# Altium PCB PCB1.PcbDoc (part 2 of 2)
Units mil, origin at the board's own origin, x right, y up, seen from the top; angles counter-clockwise.
Board outline 7000 x 5000 mil, 3 copper layers (Top Layer, GND, Bottom Layer), stack 19.578 mil thick; 137 components, 117 nets, 425 pads, 17 vias.
Unrouted connection lines stored in the file: 185.
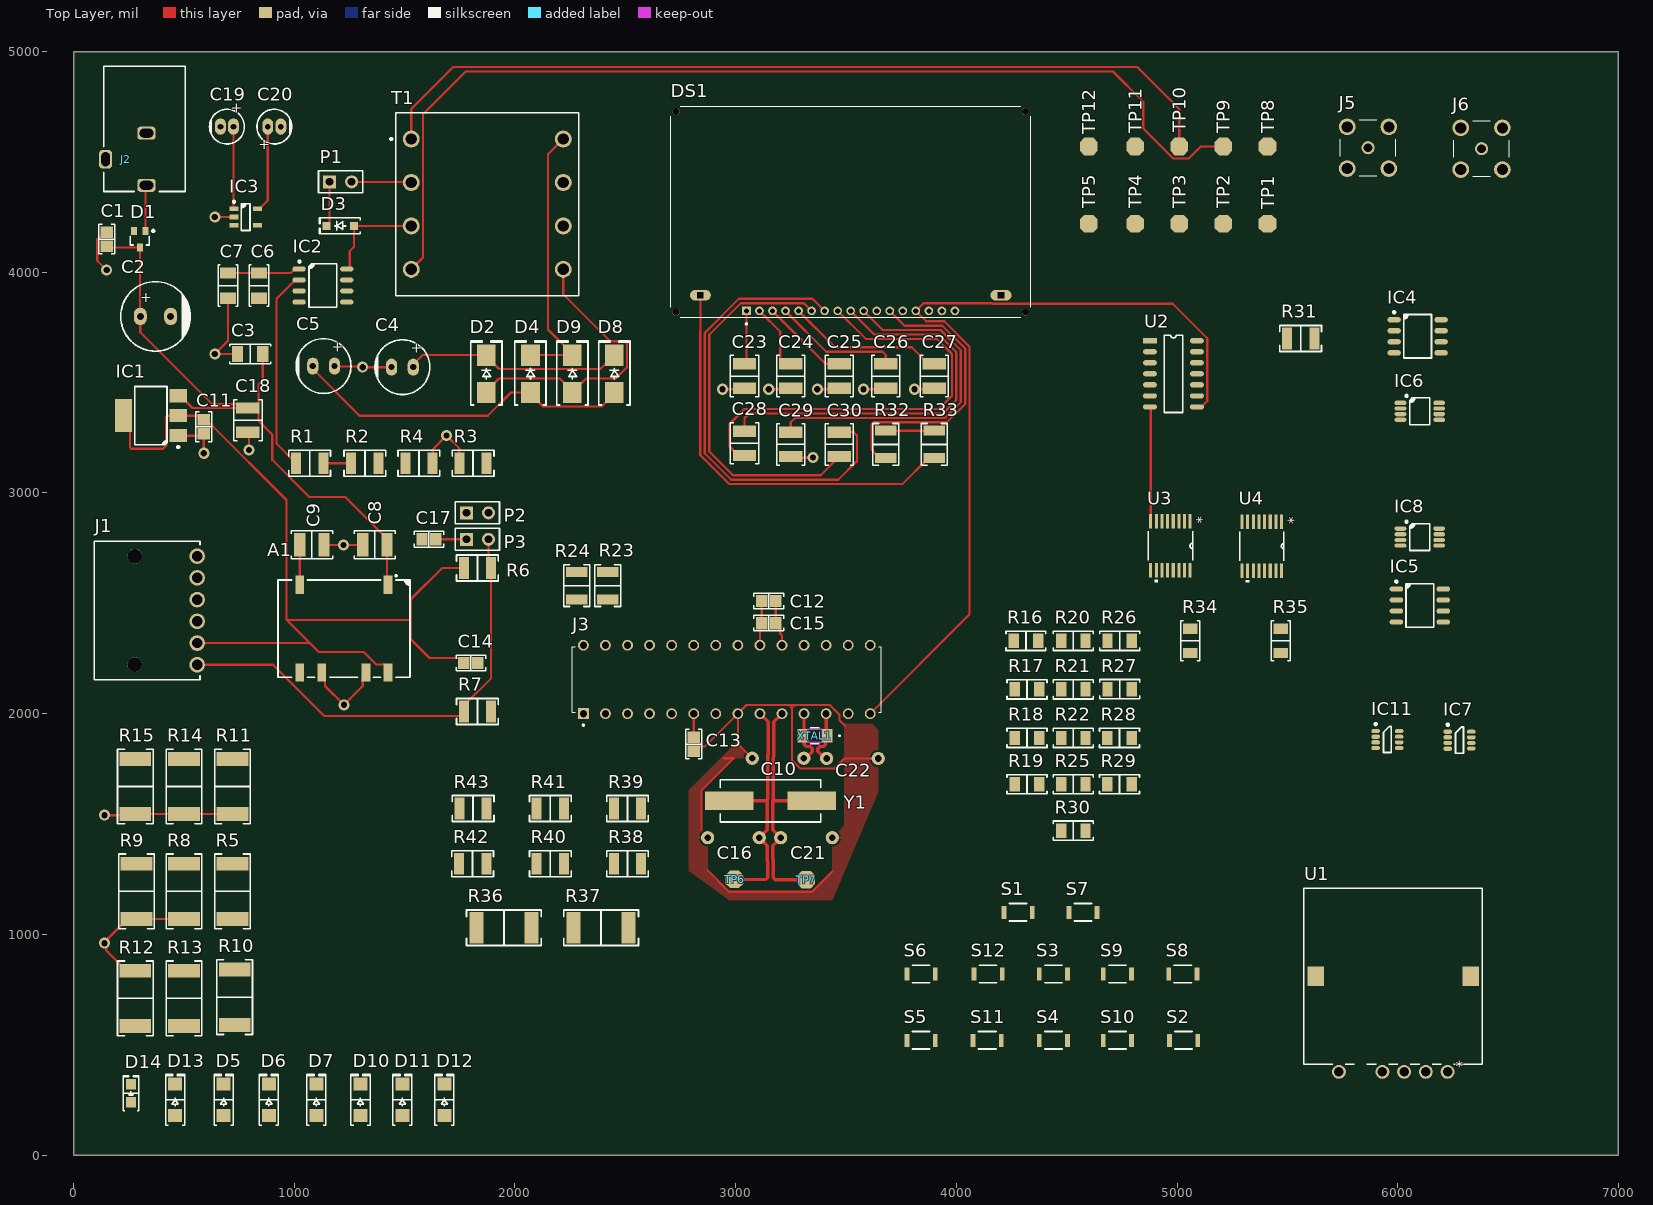
[diagram p0: Top Layer view]

## Part data (continued)
R4: library part RC1210JR-072KL, "RES 2K OHM 5% 1/2W 1210", Device Package="1210 (3225 Metric)", manufacturer=Yageo, Operating Temperature="-55°C ~ 155°C", Power (Watts)="0.5W, 1/2W", Supplier Device Package=1210, Supplier Part Number 1=13-RC1210JR-072KLCT-ND, Temperature Coefficient=±100ppm/°C, Tolerance=±5%, componentlink1description=Datasheet, componentlink1url=https://www.yageo.com/upload/media/product/productsearch/datasheet/rchip/PYu-RC_Group_51_RoHS_L_11.pdf, componentlink2description="DigiKey Link", componentlink2url=https://www.digikey.com/en/products/detail/yageo/RC1210JR-072KL/5919910, Composition="Thick Film", Features="Moisture Resistant", Height - Seated (Max)="0.024\" (0.60mm)", lastupdated="8/02/2024 9:49:20 PM", Lifecycle Status=Active, Minimum Order=1, Number of Terminations=2, Package / Case="1210 (3225 Metric)", packaging=TapeAndReel, Part Number=RC1210JR-072KL, Part Status=Active, price=0.01, Resistance="2 kOhms", series=RC_L, Size / Dimension="0.122\" L x 0.102\" W (3.10mm x 2.60mm)", Supplier 1=DigiKey
R5 R10 R12: library part RK73H3ATTE1000F, "RES 100 OHM 1% 1W 2512", Device Package="2512 (6432 Metric)", manufacturer="KOA Speer Electronics, Inc.", Operating Temperature="-55°C ~ 155°C", Power (Watts)=1W, Ratings=AEC-Q200, Supplier Device Package=2512, Supplier Part Number 1=2019-RK73H3ATTE1000FCT-ND, Temperature Coefficient=±100ppm/°C, Tolerance=±1%, componentlink1description=Datasheet, componentlink1url=http://www.koaspeer.com/catimages/Products/RK73H/RK73H.pdf, componentlink2description="DigiKey Link", componentlink2url=http://digikey.com/product-detail/en/koa-speer-electronics-inc/RK73H3ATTE1000F/2019-RK73H3ATTE1000FCT-ND/10425070, Composition="Thick Film", Features="Automotive AEC-Q200, Moisture Resistant", Height - Seated (Max)="0.028\" (0.70mm)", lastupdated="2/09/2020 1:26:50 AM", Lifecycle Status=Active, Minimum Order=1, Number of Terminations=2, Package / Case="2512 (6432 Metric)", packaging=TapeAndReel, Part Number=RK73H3ATTE1000F, Part Status=Active, price=0.05, Resistance="100 Ohms", series=RK73H, Size / Dimension="0.248\" L x 0.122\" W (6.30mm x 3.10mm)", Supplier 1=DigiKey
R6 R38 R39 R40 R41 R42 R43: library part CRMA1210AF10K0FKEF, "CRMA1210 10K 1% EF E3", Device Package="1210 (3225 Metric)", manufacturer="Vishay Dale", Operating Temperature="-55°C ~ 155°C", Power (Watts)=0.35W, Ratings=AEC-Q200, Supplier Device Package=1210, Supplier Part Number 1=541-CRMA1210AF10K0FKEFCT-ND, Temperature Coefficient=±100ppm/°C, Tolerance=±1%, componentlink1description=Datasheet, componentlink1url=https://www.vishay.com/docs/68043/crma.pdf, componentlink2description="DigiKey Link", componentlink2url=https://www.digikey.com/en/products/detail/vishay-dale/CRMA1210AF10K0FKEF/13998641, Composition="Thick Film", Features="Automotive AEC-Q200, Moisture Resistant", Height - Seated (Max)="0.029\" (0.74mm)", lastupdated="3/06/2024 8:18:49 PM", Lifecycle Status=Active, Minimum Order=1, Number of Terminations=2, Package / Case="1210 (3225 Metric)", packaging=TapeAndReel, Part Number=CRMA1210AF10K0FKEF, Part Status=Active, price=0.17, Resistance="10 kOhms", series=CRMA, Size / Dimension="0.125\" L x 0.100\" W (3.18mm x 2.54mm)", Supplier 1=DigiKey
R7: library part CRCW1210470KJNEA, "RES SMD 470K OHM 5% 1/2W 1210", Device Package="1210 (3225 Metric)", manufacturer="Vishay Dale", Operating Temperature="-55°C ~ 155°C", Power (Watts)="0.5W, 1/2W", Ratings=AEC-Q200, Supplier Device Package=1210, Supplier Part Number 1=541-470KVCT-ND, Temperature Coefficient=±200ppm/°C, Tolerance=±5%, componentlink1description=Datasheet, componentlink1url=http://www.vishay.com/docs/20035/dcrcwe3.pdf, componentlink2description="DigiKey Link", componentlink2url=https://www.digikey.com/en/products/detail/vishay-dale/CRCW1210470KJNEA/1177238, Composition="Thick Film", Features="Automotive AEC-Q200", Height - Seated (Max)="0.024\" (0.60mm)", lastupdated="3/06/2024 8:19:03 PM", Lifecycle Status=Active, Minimum Order=1, Number of Terminations=2, Package / Case="1210 (3225 Metric)", packaging=TapeAndReel, Part Number=CRCW1210470KJNEA, Part Status=Active, price=0.02, Resistance="470 kOhms", series="D/CRCW e3", Size / Dimension="0.126\" L x 0.098\" W (3.20mm x 2.50mm)", Supplier 1=DigiKey
R8 R36 R37: library part RK73H3ATTE28R0F, "RES 28 OHM 1% 1W 2512", Device Package="2512 (6432 Metric)", manufacturer="KOA Speer Electronics, Inc.", Operating Temperature="-55°C ~ 155°C", Power (Watts)=1W, Ratings=AEC-Q200, Supplier Device Package=2512, Supplier Part Number 1=2019-RK73H3ATTE28R0FCT-ND, Temperature Coefficient=±100ppm/°C, Tolerance=±1%, componentlink1description=Datasheet, componentlink1url=http://www.koaspeer.com/catimages/Products/RK73H/RK73H.pdf, componentlink2description="DigiKey Link", componentlink2url=http://digikey.com/product-detail/en/koa-speer-electronics-inc/RK73H3ATTE28R0F/2019-RK73H3ATTE28R0FCT-ND/10425047, Composition="Thick Film", Features="Automotive AEC-Q200, Moisture Resistant", Height - Seated (Max)="0.028\" (0.70mm)", lastupdated="11/04/2023 8:12:36 PM", Lifecycle Status=Active, Minimum Order=1, Number of Terminations=2, Package / Case="2512 (6432 Metric)", packaging=TapeAndReel, Part Number=RK73H3ATTE28R0F, Part Status=Active, price=0.05, Resistance="28 Ohms", series=RK73H, Size / Dimension="0.248\" L x 0.122\" W (6.30mm x 3.10mm)", Supplier 1=DigiKey
R9 R11 R13: library part CRCW2512215KFKEG, "RES SMD 215K OHM 1% 1W 2512", Device Package="2512 (6432 Metric)", manufacturer="Vishay Dale", Operating Temperature="-55°C ~ 155°C", Power (Watts)=1W, Ratings=AEC-Q200, Supplier Device Package=2512, Supplier Part Number 1=541-215KAFCT-ND, Temperature Coefficient=±100ppm/°C, Tolerance=±1%, componentlink1description=Datasheet, componentlink1url=http://www.vishay.com/docs/20035/dcrcwe3.pdf, componentlink2description="DigiKey Link", componentlink2url=http://digikey.com/product-detail/en/vishay-dale/CRCW2512215KFKEG/541-215KAFCT-ND/1178868, Composition="Thick Film", Features="Automotive AEC-Q200", Height - Seated (Max)="0.028\" (0.70mm)", lastupdated="16/04/2023 8:18:28 PM", Lifecycle Status=Active, Minimum Order=1, Number of Terminations=2, Package / Case="2512 (6432 Metric)", packaging=TapeAndReel, Part Number=CRCW2512215KFKEG, Part Status=Active, price=0.04, Resistance="215 kOhms", series=CRCW, Size / Dimension="0.248\" L x 0.124\" W (6.30mm x 3.15mm)", Supplier 1=DigiKey
R14: library part CRGCQ2512F82R, "RES 82 OHM 1% 1W 2512", Device Package="2512 (6432 Metric)", manufacturer="TE Connectivity Passive Product", Operating Temperature="-55°C ~ 155°C", Power (Watts)=1W, Ratings=AEC-Q200, Supplier Device Package=2512, Supplier Part Number 1=A129980CT-ND, Temperature Coefficient=±200ppm/°C, Tolerance=±1%, componentlink1description=Datasheet, componentlink1url=https://www.te.com/commerce/DocumentDelivery/DDEController?Action=srchrtrv&DocNm=1773204-3&DocType=DS&DocLang=English, componentlink2description="DigiKey Link", componentlink2url=https://www.digikey.com/en/products/detail/te-connectivity-passive-product/CRGCQ2512F82R/8576582, Composition="Thick Film", Features="Automotive AEC-Q200, Moisture Resistant", Height - Seated (Max)="0.026\" (0.65mm)", lastupdated="17/02/2022 6:29:19 PM", Lifecycle Status=Active, Minimum Order=1, Number of Terminations=2, Package / Case="2512 (6432 Metric)", packaging=TapeAndReel, Part Number=CRGCQ2512F82R, Part Status=Active, price=0.06, Resistance="82 Ohms", series=CRGCQ, Size / Dimension="0.250\" L x 0.126\" W (6.35mm x 3.20mm)", Supplier 1=DigiKey
R15: library part CRCW2512130RFKEG, "RES SMD 130 OHM 1% 1W 2512", Device Package="2512 (6432 Metric)", manufacturer="Vishay Dale", Operating Temperature="-55°C ~ 155°C", Power (Watts)=1W, Ratings=AEC-Q200, Supplier Device Package=2512, Supplier Part Number 1=541-130AFCT-ND, Temperature Coefficient=±100ppm/°C, Tolerance=±1%, componentlink1description=Datasheet, componentlink1url=http://www.vishay.com/docs/20035/dcrcwe3.pdf, componentlink2description="DigiKey Link", componentlink2url=http://digikey.com/product-detail/en/vishay-dale/CRCW2512130RFKEG/541-130AFCT-ND/3232072, Composition="Thick Film", Features="Automotive AEC-Q200", Height - Seated (Max)="0.028\" (0.70mm)", lastupdated="2/09/2020 1:26:55 AM", Lifecycle Status=Active, Minimum Order=1, Number of Terminations=2, Package / Case="2512 (6432 Metric)", packaging=TapeAndReel, Part Number=CRCW2512130RFKEG, Part Status=Active, price=0.04, Resistance="130 Ohms", series=CRCW, Size / Dimension="0.248\" L x 0.124\" W (6.30mm x 3.15mm)", Supplier 1=DigiKey
R16 R18 R19 R20 R21 R22 R25 R26 R27 R28 R29 R30: library part RG3216P-3304-B-T1, "RES 3.3M OHM 0.1% 1/4W 1206", Device Package="1206 (3216 Metric)", manufacturer=Susumu, Operating Temperature="-55°C ~ 155°C", Power (Watts)="0.25W, 1/4W", Ratings=AEC-Q200, Supplier Device Package=1206, Supplier Part Number 1=408-2035-1-ND, Temperature Coefficient=±25ppm/°C, Tolerance=±0.1%, componentlink1description=Datasheet, componentlink1url=http://www.susumu.co.jp/common/pdf/n_catalog_partition01_en.pdf, componentlink2description="DigiKey Link", componentlink2url=https://www.digikey.com/en/products/detail/susumu/RG3216P-3304-B-T1/7035379, Composition="Thin Film", Features="Anti-Sulfur, Automotive AEC-Q200", Height - Seated (Max)="0.020\" (0.50mm)", lastupdated="9/02/2024 8:54:00 PM", Lifecycle Status=Active, Minimum Order=1, Number of Terminations=2, Package / Case="1206 (3216 Metric)", packaging=TapeAndReel, Part Number=RG3216P-3304-B-T1, Part Status=Active, partid=38871, price=0.14, Resistance="3.3 MOhms", series=RG, Size / Dimension="0.126\" L x 0.063\" W (3.20mm x 1.60mm)", Supplier 1=DigiKey
R17: library part ERA-8APB332V, "RES SMD 3.3K OHM 0.1% 1/4W 1206", Device Package="1206 (3216 Metric)", manufacturer="Panasonic Electronic Components", Operating Temperature="-55°C ~ 155°C", Power (Watts)="0.25W, 1/4W", Ratings=AEC-Q200, Supplier Device Package=1206, Supplier Part Number 1=P3.3KCRCT-ND, Temperature Coefficient=±15ppm/°C, Tolerance=±0.1%, componentlink1description=Datasheet, componentlink1url=https://industrial.panasonic.com/cdbs/www-data/pdf/RDM0000/AOA0000C307.pdf, componentlink2description="DigiKey Link", componentlink2url=https://www.digikey.com/en/products/detail/panasonic-electronic-components/ERA-8APB332V/5141025, Composition="Thin Film", Features="Automotive AEC-Q200", Height - Seated (Max)="0.028\" (0.70mm)", lastupdated="9/02/2024 8:54:35 PM", Lifecycle Status=Active, Minimum Order=1, Number of Terminations=2, Package / Case="1206 (3216 Metric)", packaging=TapeAndReel, Part Number=ERA-8APB332V, Part Status=Active, partid=28968, price=0.31, Resistance="3.3 kOhms", series=ERA-8A, Size / Dimension="0.126\" L x 0.063\" W (3.20mm x 1.60mm)", Supplier 1=DigiKey
R23 R24: library part MP30R00, "MP30R00 0.1% BULK", Device Package="1210 (3225 Metric)", manufacturer="Vishay Foil Resistors (Division of Vishay Precision Group)", Operating Temperature="-65°C ~ 175°C", Power (Watts)="0.1W, 1/10W", Supplier Device Package=2-SMD, Supplier Part Number 1=MP30R00-ND, Temperature Coefficient=±10ppm/°C, Tolerance=±0.1%, componentlink1description=Datasheet, componentlink1url=https://media.digikey.com/pdf/Data%20Sheets/Vishay%20Resistors/MP,%20MQ_Series.pdf, componentlink2description="DigiKey Link", componentlink2url=https://www.digikey.com/en/products/detail/vishay-foil-resistors-division-of-vishay-precision-group/MP30R00/8580916, Composition="Metal Foil", Height - Seated (Max)="0.087\" (2.20mm)", lastupdated="3/06/2024 8:18:48 PM", Lifecycle Status=Active, Minimum Order=1, Number of Terminations=2, Package / Case="1210 (3225 Metric)", packaging=Bulk, Part Number=MP30R00, Part Status=Active, price=4.65, Resistance="30 Ohms", series=MP, Size / Dimension="0.126\" L x 0.098\" W (3.20mm x 2.50mm)", Supplier 1=DigiKey
R31: library part RMCF1210JT820K, "RES 820K OHM 5% 1/3W 1210", Device Package="1210 (3225 Metric)", manufacturer="Stackpole Electronics Inc", Operating Temperature="-55°C ~ 155°C", Power (Watts)="0.333W, 1/3W", Ratings=AEC-Q200, Supplier Device Package=1210, Supplier Part Number 1=RMCF1210JT820KCT-ND, Temperature Coefficient=±200ppm/°C, Tolerance=±5%, componentlink1description=Datasheet, componentlink1url=https://www.seielect.com/catalog/sei-rmcf_rmcp.pdf, componentlink2description="DigiKey Link", componentlink2url=https://www.digikey.com/en/products/detail/stackpole-electronics-inc/RMCF1210JT820K/1757292, Composition="Thick Film", Features="Automotive AEC-Q200", Height - Seated (Max)="0.028\" (0.70mm)", lastupdated="3/06/2024 8:18:51 PM", Lifecycle Status=Active, Minimum Order=1, Number of Terminations=2, Package / Case="1210 (3225 Metric)", packaging=TapeAndReel, Part Number=RMCF1210JT820K, Part Status=Active, price=0.02, Resistance="820 kOhms", series=RMCF, Size / Dimension="0.126\" L x 0.098\" W (3.20mm x 2.50mm)", Supplier 1=DigiKey
R32 R33: library part TNPW121010K0BEEN, "RES 10K OHM 0.1% 1/2W 1210", Device Package="1210 (3225 Metric)", manufacturer="Vishay Dale", Operating Temperature="-55°C ~ 155°C", Power (Watts)="0.5W, 1/2W", Ratings=AEC-Q200, Supplier Device Package=1210, Supplier Part Number 1=541-TNPW121010K0BEENCT-ND, Temperature Coefficient=±25ppm/°C, Tolerance=±0.1%, componentlink1description=Datasheet, componentlink1url=http://www.vishay.com/docs/28758/tnpw_e3.pdf, componentlink2description="DigiKey Link", componentlink2url=https://www.digikey.com/en/products/detail/vishay-dale/TNPW121010K0BEEN/1611704, Composition="Thin Film", Features="Anti-Sulfur, Automotive AEC-Q200, Moisture Resistant", Height - Seated (Max)="0.030\" (0.75mm)", lastupdated="3/06/2024 8:18:52 PM", Lifecycle Status=Active, Minimum Order=1, Number of Terminations=2, Package / Case="1210 (3225 Metric)", packaging=TapeAndReel, Part Number=TNPW121010K0BEEN, Part Status=Active, price=0.91, Resistance="10 kOhms", series="TNPW e3", Size / Dimension="0.126\" L x 0.096\" W (3.20mm x 2.45mm)", Supplier 1=DigiKey
R34 R35: library part RMCF1206FT40K2, "RES 40.2K OHM 1% 1/4W 1206", Device Package="1206 (3216 Metric)", manufacturer="Stackpole Electronics Inc", Operating Temperature="-55°C ~ 155°C", Power (Watts)="0.25W, 1/4W", Ratings=AEC-Q200, Supplier Device Package=1206, Supplier Part Number 1=RMCF1206FT40K2CT-ND, Temperature Coefficient=±100ppm/°C, Tolerance=±1%, componentlink1description=Datasheet, componentlink1url=https://www.seielect.com/catalog/sei-rmcf_rmcp.pdf, componentlink2description="DigiKey Link", componentlink2url=https://www.digikey.com/en/products/detail/stackpole-electronics-inc/RMCF1206FT40K2/1754014, Composition="Thick Film", Features="Automotive AEC-Q200", Height - Seated (Max)="0.028\" (0.70mm)", lastupdated="9/02/2024 8:54:45 PM", Lifecycle Status=Active, Minimum Order=1, Number of Terminations=2, Package / Case="1206 (3216 Metric)", packaging=TapeAndReel, Part Number=RMCF1206FT40K2, Part Status=Active, partid=26907, price=0.01, Resistance="40.2 kOhms", series=RMCF, Size / Dimension="0.126\" L x 0.063\" W (3.20mm x 1.60mm)", Supplier 1=DigiKey
S1 S2 S3 S4 S5 S6 S7 S8 S9 S10 S11 S12: "SWITCH TACTILE SPST-NO 0.02A 15V", Contact Rating @ Voltage="0.02A @ 15VDC", manufacturer=C&K, Operating Force=240gf, Operating Temperature="-40°C ~ 85°C", Supplier Part Number 1=CKN10779CT-ND, Actuator Height off PCB, Vertical=0.60mm, Actuator Orientation="Top Actuated", Actuator Type=Standard, Circuit=SPST-NO, componentlink1description=Datasheet, componentlink1url=https://dznh3ojzb2azq.cloudfront.net/products/Tactile/KXT3/documents/datasheet.pdf, componentlink2description="DigiKey Link", componentlink2url=https://www.digikey.com/en/products/detail/c-k/KXT-331-LHS/6599754, Illumination=Non-Illuminated, lastupdated="3/06/2024 8:19:27 PM", Lifecycle Status=Active, Minimum Order=1, Mounting Type="Surface Mount", Outline="3.00mm x 2.00mm", packaging=TapeAndReel, Part Number="KXT 331 LHS", Part Status=Active, price=0.13, series=KXT3, Supplier 1=DigiKey, Switch Function=Off-Mom, Termination Style="SMD (SMT) Tab"
T1: library part 750310042, "WE-PoE++ Power over Ethernet Plus Plus Transformer, THT, EFD20, Ui = 30-57V, Uo1 = 12V/5A, Uo2 = -12V/1.6A", Auxiliary Voltage=12V, Case/Size Code=EFD20, Inductance=154uH, Input Voltage=30-57VDC, Insulation Test Voltage=1500V, Leakage Inductance=2uH, manufacturer="Wurth Elektronik", Operating Temperature Max=125°C, Operating Temperature Min=-40°C, Output Current 1=5A, Output Current 2=1.6A, Output Voltage 2=-12V, Switching Frequency=250-400kHz, Category="Transformers For DC-DC Converter", componentlink1description="Website Link", componentlink1url=https://www.we-online.com/redexpert/article/750310042?ad, componentlink2description="Datasheet Link", componentlink2url=https://www.we-online.com/redexpert/spec/750310042?ad, Height=10.8mm, Length=21.08mm, Manufacturer Part Number=750310042, Match Code=WE-PoE++, Mount="Through Hole", Output Voltage 1=12V, packaging="Tape and Reel", Turns Ratio=2:1:1:1, Width=21.08mm
TP1 TP2 TP3 TP4 TP5 TP6 TP7 TP8 TP9 TP10 TP11 TP12: library part Test_point_1
U1: "No Description Available", Mfr_Name=Panasonic, RefDes=RefDes, Type=Type
U2 U3 U4: "No Description Available", Mfr_Name="Texas Instruments", RefDes=RefDes, Type=Type
XTAL1: "No Description Available", Mfr_Name=Epson
Y1: library part ABLS-4.000MHZ-20-D-4-H-T, "CRYSTAL 4.0000MHZ 20PF SMD", ESR (Equivalent Series Resistance)="180 Ohms", Frequency Stability=±35ppm, Frequency Tolerance=±30ppm, Load Capacitance=20pF, manufacturer="Abracon LLC", Operating Mode=Fundamental, Operating Temperature="-40°C ~ 85°C", Package / Case=HC-49/US, Supplier Part Number 1=535-14920-1-ND, componentlink1description=Datasheet, componentlink1url=https://abracon.com/Resonators/abls.pdf, componentlink2description="DigiKey Link", componentlink2url=http://digikey.com/product-detail/en/abracon-llc/ABLS-4.000MHZ-20-D-4-H-T/535-14920-1-ND/9997997, Frequency=4MHz, Height - Seated (Max)="0.165\" (4.20mm)", lastupdated="8/02/2024 9:34:21 PM", Lifecycle Status=Active, Minimum Order=1, Mounting Type="Surface Mount", packaging=TapeAndReel, Part Number=ABLS-4.000MHZ-20-D-4-H-T, Part Status=Active, partid=85, price=0.29, series=ABLS, Size / Dimension="0.449\" L x 0.185\" W (11.40mm x 4.70mm)", Supplier 1=DigiKey, Type="MHz Crystal"

## Via types
v1: diameter 50, hole 28, Top Layer to GND, tented top, 9 vias
v2: diameter 50, hole 28, Top Layer to Bottom Layer, tented top, 6 vias
v3: diameter 50, hole 28, Top Layer to GND, 2 vias

## Nets (pads, with @x,y where several pads share a name; then routed paths per layer and width w, separated by ;. In a path a pad name is that pad's centre, name@x,y a point inside that pad or via, vN(x,y) a via of type N, cw(c..) or ccw(c..) an arc to the next point about the centre after c; other vN are vias at no path point)
3.3V: A1.10 C11.1 C12.2 C13.2 C14.2 C15.2 D6.1 IC1.2 IC1.4 J1.2 J3.6 J3.20 R6.2 R16.1 R17.2 R18.1 R19.1 R20.1 R21.1 R22.1 R25.1 R26.1 R27.1 R28.1 R29.1 R30.1 R32.2 R33.2 R34.2 R35.2 TP3.TP1 | length 4691.1
  Top Layer w10: IC1.4 255,3320.98 255,3205.86 260.86,3200 405,3200 419.65,3214.65 419.65,3344.14 425.5,3350 571.5,3350 C11.1 610.59,3310.91 621.96,3310.91 965,2967.87 965,2425 ; J1.2 1070,2320 ; 1092.5,2297.5 1070,2320 ; A1.10@1417.64,2178.82 A1.10 1425,2207.83 1410.31,2222.52 1370.9,2222.52 1314.23,2279.19 1110.81,2279.19 1070,2320 ; R6.2 1670,2660 1529.14,2519.14 1529.14,2425 ; C14.2 1768.5,2231.97 1747.91,2252.56 1612.44,2252.56 1529.14,2335.86 1529.14,2425 ; C13.2 J3.6 ; J3.20 3110,2401.5 C15.2 C12.2 ; R32.2 R33.2 ; 965,2425 1070,2320 ; 965,2425 1529.14,2425
+5: C20.1 D11.1 IC3.5 IC7.2 IC11.2 R31.2 TP12.TP1 | length 397.2
  Top Layer w10: IC3.5 842.01,4287.4 880,4325.39 C20.1
+6.5V: A1.5 C9.2 C19.1 D12.1 IC3.1 IC6.3 IC8.3 TP11.TP1 | length 554.8
  Top Layer w10: C19.1 724.53,4289.72 IC3.1 ; C9.2 1024.76,2584.06 A1.5
+12: C4.1 D2.2 D7.1 D8.2 IC4.8 IC5.8 R2.2 TP5.TP1 | length 1000.2
  Top Layer w10: C4.1 1539.21,3582.8 1581.06,3624.65 D2.2 1870,3618.74 1927.32,3561.42 2386.77,3561.42 2406.77,3581.42 2412.68,3581.42 2450,3618.74 D8.2
-12: C5.2 D4.1 D8.1 D10.2 IC4.4 IC5.4 TP4.TP1 | length 1569.8
  Top Layer w10: C5.2 1083.79,3562.2 1295.99,3350 1876.41,3350 1981.76,3455.35 D4.1 2070,3449.45 2127.32,3392.13 2392.68,3392.13 2450,3449.45 D8.1
CLK: J3.13 U3.2 U4.2
"CS MPU A": J3.23 U2.1
"CS MPU B": J3.24 U2.2
D13: D13.1 J3.25
D14: D14.1 J3.26
DIN-02: U1.2 U3.12
DIN-04: U1.4 U3.14
DIN-05: S1.2 U3.3
DIN-06: S2.2 U3.4
DIN-07: S3.2 U3.5
DIN-08: S4.2 U3.6
DIN-09: S5.2 U4.14
DIN-10: S6.2 U4.13
DIN-11: S7.2 U4.12
DIN-12: S8.2 U4.11
DIN-13: S9.2 U4.3
DIN-14: S10.2 U4.4
DIN-15: S11.2 U4.5
DIN-16: S12.2 U4.6
"DPOT A FB": IC5.2 IC7.1
"DPOT A IN": IC4.1 IC4.2 IC7.7
"DPOT A OUT": IC5.1 IC7.8 J5.1
"DPOT B FB": IC5.6 IC11.1
"DPOT B IN": IC4.6 IC4.7 IC11.7
"DPOT B OUT": IC5.7 IC11.8 J6.1
ENC-PWR: R17.1 U1.5
GND: A1.7 A1.9 C1.1 C2.2 C3.1 C4.2 C5.1 C7.1 C8.1 C9.1 C10.1 C11.2 C12.1 C13.1 C14.1 C15.1 C16.1 C17.1 C18.1 C19.2 C20.2 C21.1 C22.1 C23.2 C24.2 C25.2 C26.2 C27.2 C29.1 DS1.11 DS1.K IC1.1 IC2.6 IC2.7 IC3.2 IC5.3 IC5.5 IC6.2 IC7.3 IC8.2 IC11.3 J1.3 J2.2 J2.3 J3.8 J3.19 J5.G1 J5.G2 J5.G3 J5.G4 J6.G1 J6.G2 J6.G3 J6.G4 R3.1 R4.1 R8.1 R9.1 R11.1 R12.2 R14.1 R15.1 R36.1 R37.1 R38.2 R39.1 R40.1 R41.1 R42.1 R43.1 T1.6 T1.7 TP2.TP1 U2.7 U3.1 U3.8 U4.1 U4.8 | length 7466
  Top Layer w10: v1(140,1540) 275,1540 R15.1 R14.1 R11.1 ; v1(150,4010) 107.44,4052.56 107.44,4150.31 118.04,4160.91 129.41,4160.91 C1.1 ; R12.2 239.65,835 147.65,926.99 147.65,952.35 v1(140,960) 140,965.35 244.65,1070 R9.1 R8.1 ; IC1.1 580.94,3259.45 C11.2@585.47,3263.98 ; v1(590,3180) C11.2@590,3263.98 ; C11.2@596.5,3263.98 C11.2@590,3263.98 ; v3(640,4250) IC3.2 ; C7.1 700,3690 v1(640,3630) C3.1 ; C18.1 794.72,3270.16 v1(794.72,3194.72) ; A1.7 1139.69,2171.5 1139.69,2125.31 v1(1225,2040) 1310.31,2125.31 1310.31,2171.5 A1.9 ; C9.1 1136,2764 v3(1223,2764) 1308.88,2764 C8.1 ; C5.1 1184.71,3572.5 1307.5,3572.5 v1(1310,3570) C4.2 ; R4.1 1627.01,3197.01 v1(1690,3260) 1747.99,3202.01 R3.1 ; C13.1@2830.59,1809.41 C13.1 2830.59,1850.59 2860.59,1850.59 J3.8 ; 2845.75,1474.39 2845.75,1652.55 2991.2,1798 2947.94,1798 ; 2873,1289.79 2969.79,1193 3346.21,1193 3438,1284.79 ; C16.1 C16.1@2873,1447.14 ; v2(2940,3470) 3035.12,3470 C23.2 ; C10.1 3010,1863 J3.8 ; v2(3150,3470) 3245.12,3470 C24.2 ; C12.1 C15.1 3202.09,2389.41 3202.09,2361.73 3210,2353.82 J3.19 ; C29.1 3254.88,3160 v2(3350,3160) ; v2(3370,3470) 3465.12,3470 C25.2 ; 3495,1945 3470.39,1969.61 3470.39,1995.62 3426.41,2039.61 3253,2039.61 ; v2(3580,3470) 3675.12,3470 C26.2 ; C22.1 3493.24,1797 3448.24,1752 3291.36,1752 3255,1788.36 3255,2037.61 3253,2039.61 ; v2(3810,3470) 3895.12,3470 C27.2 ; U2.7 4880.43,3386.97 U3.8 ; C11.2@585.47,3263.98 C11.2@590,3263.98 ; C11.2@585.47,3263.98 C11.2 C11.2@590,3263.98 ; J3.8 3049.61,2039.61 3253,2039.61
"IC2 FB": IC2.2 R1.1 R3.2 | length 919.4
  Top Layer w10: R1.1 920,3222.99 920,3880.98 1004.02,3965 IC2.2
"IC2 VC+": C6.2 C7.2 IC2.1 | length 329.5
  Top Layer w10: C7.2 C6.2 984.01,3997.09 1001.93,4015 IC2.1
"Jumper 1": D3.2 P1.1 | length 205.8
  Top Layer w10: D3.2 1145.98,4210.98 1160,4225 P1.1
MCLR: J3.1 R7.1
"MPU CLR": J3.22 U2.9
N2: D2.1 D9.1 T1.5 | length 1348.9
  Top Layer w10: D2.1 1870,3461.26 1927.32,3518.58 2202.68,3518.58 D9.1@2260,3461.26 ; T1.5 2218.98,3901.02 2432.13,3687.87 2498.54,3687.87 2507.32,3679.09 2507.32,3570.2 2455.7,3518.58 2323.23,3518.58 2303.23,3498.58 2297.32,3498.58 D9.1@2260,3461.26 ; D9.1@2260,3461.26 D9.1 D9.1@2260,3461.26
N3: D4.2 D9.2 T1.8 | length 1243.2
  Top Layer w10: D4.2 D9.2 2260,3630.55 2150,3740.55 2150,4534.72 T1.8
NetC6_1: C6.1 R4.2
NetC23_1: C23.1 DS1.1 | length 243.5
  Top Layer w10: C23.1 3048.78,3593.9 DS1.1
NetC24_1: C24.1 DS1.2 | length 314.9
  Top Layer w10: DS1.2 3201.85,3730.98 3201.85,3605.71 3222.44,3585.12 C24.1
NetC25_1: C25.1 DS1.3 | length 402.5
  Top Layer w10: DS1.3 3406.77,3585.12 C25.1
NetC26_1: C26.1 DS1.4 | length 577.2
  Top Layer w10: DS1.4 3410.94,3640 3665.71,3640 3680,3625.71 C26.1
NetC27_1: C27.1 DS1.5 | length 714.4
  Top Layer w10: DS1.5 3450,3660 3797.56,3660 3872.44,3585.12 C27.1
NetC28_1: C28.1 DS1.8 | length 2036.2
  Top Layer w10: C28.1 3012.44,3170 2971.85,3210.59 2971.85,3312.04 3039.81,3380 3920,3380 3980,3440 3980,3630 3911.85,3698.15 3589.01,3698.15 DS1.8
NetC28_2: C28.2 DS1.9 | length 1827.3
  Top Layer w10: C28.2 3040,3340 3060,3360 3940,3360 4000,3420 4000,3638.28 3920.13,3718.15 3628.07,3718.15 DS1.9
NetC29_2: C29.2 DS1.10 | length 1601.4
  Top Layer w10: C29.2 3250,3320 3270,3340 3948.28,3340 4020,3411.72 4020,3646.57 3928.42,3738.15 3667.12,3738.15 DS1.10
NetC30_1: C30.1 DS1.6 | length 1736.1
  Top Layer w10: DS1.6 3309.37,3859.69 3022.88,3859.69 2880,3716.8 2880,3188.28 2988.28,3080 3385.12,3080 C30.1
NetC30_2: C30.2 DS1.7 | length 2151.1
  Top Layer w10: DS1.7 3348.43,3879.69 3014.6,3879.69 2860,3725.09 2860,3180 2980,3060 3465.07,3060 3550,3144.93 3550,3260 3534.88,3275.12 C30.2
NetD3_1: D3.1 IC2.8 T1.3 | length 472.3
  Top Layer w10: IC2.8 1244.69,4015 1250.98,4021.29 1250.98,4095.48 1270,4114.5 D3.1 T1.3
NetD5_2: D5.2 R5.2
NetD6_2: D6.2 R8.2
NetD7_2: D7.2 R10.2
NetD10_1: D10.1 R13.1
NetD11_2: D11.2 R14.2
NetD12_2: D12.2 R15.2
NetD13_2: D13.2 R37.2
NetD14_2: D14.2 R36.2
NetDS1_12: DS1.12 R32.1 | length 1321.1
  Top Layer w10: R32.1 3653.43,3157.99 3615.79,3195.63 3615.79,3310.86 3624.93,3320 3956.57,3320 4040,3403.43 4040,3654.85 3936.7,3758.15 3765.23,3758.15 DS1.12
NetDS1_15: DS1.15 U2.11
NetDS1_16: DS1.16 U2.10
NetDS1_17: DS1.17 U2.12
NetDS1_A: DS1.A R33.1 | length 1887.6
  Top Layer w10: DS1.A 2840.12,3733.49 2840,3733.37 2840,3171.72 2971.72,3040 3755.43,3040 3873.43,3157.99 R33.1
NetIC6_6: IC6.6 U2.3
NetIC7_6: IC7.6 U2.5
NetIC8_6: IC8.6 U2.4
NetIC11_6: IC11.6 U2.6
NetJ3_2: J3.2 R40.2
NetJ3_3: J3.3 R41.2
NetJ3_4: J3.4 R42.2
NetJ3_5: J3.5 R38.1
NetJ3_7: J3.7 R39.2
NetJ3_15: J3.15 R43.2
NetR1_2: R1.2 R2.1 | length 126
  Top Layer w10: R1.2 R2.1
NetR5_1: R5.1 R9.2
NetR10_1: R10.1 R11.2
NetR12_1: R12.1 R13.2
NetR31_1: R31.1 U2.14
NetR34_1: R34.1 U3.16
NetR35_1: R35.1 U4.16
NetU1_1: U1.1 U3.11
NetU1_3: U1.3 U3.13
"OSC A +": IC4.3 IC6.1
"OSC B +": IC4.5 IC8.1
PGC: J1.5 R23.2
PGC_MPU: J3.27 R23.1
PGD: J1.4 R24.2
PGD_MPU: J3.28 R24.1
"Pgr jmp 1": J1.1 P3.2 R6.1 R7.2 | length 2149.9
  Top Layer w10: J1.1 903.43,2221.57 1135,1990 1750.35,1990 1767.99,2007.64 1767.99,2036.57 1892.01,2160.59 R6.1 1880,2672.01 P3.2
"Prg jmp 2": C17.2 P3.1 | length 138.5
  Top Layer w10: C17.2 P3.1
"SDA OUT": IC6.4 IC7.5 IC8.4 IC11.5 J3.16
"SHR 1": J3.17 U3.9
"SHR 2": J3.18 U4.9
"SI DS": DS1.13 J3.21
SW-DIN-05: R16.2 S1.1
SW-DIN-06: R18.2 S2.1
SW-DIN-07: R19.2 S3.1
SW-DIN-08: R20.2 S4.1
SW-DIN-09: R21.2 S5.1
SW-DIN-10: R22.2 S6.1
SW-DIN-11: R25.2 S7.1
SW-DIN-12: R26.2 S8.1
SW-DIN-13: R27.2 S9.1
SW-DIN-14: R28.2 S10.1
SW-DIN-15: R29.2 S11.1
SW-DIN-16: R30.2 S12.1
SYNC: DS1.14 IC6.5 IC7.4 IC8.5 IC11.4 J3.14 TP8.TP1 U2.8 | length 3902
  Top Layer w10: J3.14 4060,2450 4060,3663.14 3944.99,3778.15 3863.34,3778.15 DS1.14 3851.18,3859.69 4159.88,3859.69 4162.48,3857.09 4980.52,3857.09 5136.5,3701.11 5136.5,3416.81 5109.69,3390 U2.8
TP1: IC2.3 TP1.TP1
TP9: T1.4 TP9.TP1 | length 4689.7
  Top Layer w10: T1.4 1583.39,4066.54 1583.39,4716.61 1776.77,4910 4710,4910 4846.89,4773.11 4846.89,4651.89 4983.79,4515 5051.89,4515 5106.89,4570 TP9.TP1
TP10: T1.1 TP10.TP1 | length 3943.7
  Top Layer w10: T1.1 1530,4740 1720,4930 4820,4930 5010,4740 TP10.TP1
VCC: A1.1 C1.2 C2.1 C3.2 C8.2 C18.2 D1.2 D5.1 IC1.3 IC2.5 P1.2 T1.2 | length 3188.2
  Top Layer w10: C1.2 155.91,4112.6 D1.2 301.1,4111.5 301.1,3801.1 C2.1 302.2,3727.8 627.71,3402.29 741.85,3402.29 744.88,3399.26 C18.2@744.88,3385.12 ; IC1.3 483.86,3440.55 539.29,3385.12 C18.2 C18.2@817.56,3385.12 ; C3.2@857.09,3639.84 C3.2 857.09,3512.11 838.15,3493.17 838.15,3405.71 C18.2@817.56,3385.12 ; P1.2 1261.57,4408.43 1528.43,4408.43 T1.2 ; A1.1 1420.12,2588.7 C8.2 1420.12,2792.56 1231.14,2981.54 1068.39,2981.54 900,3149.93 900,3264.84 838.15,3326.69 838.15,3364.53 C18.2@817.56,3385.12
Vin: D1.1 J2.1 | length 208.5
  Top Layer w10: D1.1 325.59,4389.69 J2.1
X_N: C10.2 J3.11 XTAL1.2 | length 246.8
  Top Layer w15: C10.2 3316.21,1798 3346.5,1828.29 3346.5,1842.21 3337.71,1851 3320.75,1851 3310.5,1861.25 3310.5,1906.5 3310,1907 J3.11
X_P: C22.2 J3.12 XTAL1.1 | length 243
  Top Layer w15: XTAL1.1@3410,1905 J3.12 ; C22.2 3404.29,1797 3371.5,1829.79 3371.5,1842.21 3380.29,1851 3397.25,1851 3407.5,1861.25 3407.5,1892.5 XTAL1.1@3412,1897
Y_N: C21.2 J3.10 TP7.TP1 Y1.1 | length 1115.9
  Top Layer w15: 3168,1608 3168,1474 C21.2 3168,1402 3168,1342.11 3170,1340.11 3170,1257.29 3179.29,1248 TP7.TP1 ; J3.10 3172.5,1962.5 3172.5,1805.65 3170.49,1803.64 3170.49,1613.79 3179.28,1605 Y1.1
Y_P: C16.2 J3.9 TP6.TP1 Y1.2 | length 1118.7
  Top Layer w15: Y1.2@2969,1603.02 Y1.2 3136.71,1605 3145.49,1613.79 3145.49,1814 3147.5,1816 3147.5,1962.5 J3.9 ; TP6.TP1 2995.5,1248.5 3136.21,1248.5 3145,1257.29 3145,1329.75 3143,1331.75 3143,1402 C16.2 3143,1474 3143,1608
pads on no net: A1.6 D1.3 DS1. IC2.4 IC3.3 IC3.4 IC6.7 IC6.8 IC8.7 IC8.8 J1.6 J1.SH P2.1 P2.2 U1.6 U1.7 U2.13 U3.7 U3.10 U3.15 U4.7 U4.10 U4.15

## Polygon pours and split planes (outlines as drawn)
GND on Top Layer "GND_L01_P011" (solid, pour order 11): 3075,1798 3010,1863 2991.2,1844.2 2991.2,1798
GND on Top Layer "GND_L01_P012" (solid, pour order 12): 3232,2039 3276,2039 3255,2018
GND on Top Layer "GND_L01_P005" (solid, pour order 5): 2970,1155 2970,1192.79 2873.79,1289 2787,1289
GND on Top Layer "GND_L01_P010" (solid, pour order 10): 2787,1653 2845.75,1653 3010,1817.25 3010,1876
GND on Top Layer "GND_L01_P009" (solid, pour order 9): 2845.75,1653 2845.75,1474.39 2873,1438 2787,1500 2787,1514 2787,1653
GND on Top Layer "GND_L01_P006" (solid, pour order 6): 2787,1289 2872.21,1289 2873,1289.79 2873,1444 2787,1500
GND on Top Layer "GND_L01_P004" (solid, pour order 4): 2969.79,1193 3400,1193 3438,1155 2970,1155
GND on Top Layer "GND_L01_P003" (solid, pour order 3): 3438,1155 3438,1284.79 3308.21,1155 3305,1155
GND on Top Layer "GND_L01_P002" (solid, pour order 2): 3646,1646 3438,1438 3438,1155
GND on Top Layer "GND_L01_P000" (solid, pour order 0): 3646,1646 3491.44,1491.44 3491.44,1954.88 3619.8,1954.88 3646,1925.94
GND on GND (split plane): 6979.9,20.1 20.1,20.1 20.1,4979.9 6979.9,4979.9

## Text inside footprints (layer, text, board x,y; h text height)
C2: Top Overlay "+" at 302.2,3849.21 h78.74
C4: Top Overlay "+" at 1527.4,3619.21 h78.74
C5: Top Overlay "+" at 1170.4,3624.21 h78.74
C19: Top Overlay "+" at 712.72,4706.26 h78.74
C20: Top Overlay "+" at 891.81,4613.74 h78.74 r180
U1: Top Overlay "*" at 6262.38,376.93 h50; Mechanical 13 "*" at 6262.38,326.93 h50
U3: Top Overlay "*" at 5068.57,2893.5 h50 r270; Mechanical 13 "*" at 5068.57,2893.5 h50 r270
U4: Top Overlay "*" at 5482.54,2892.5 h50 r270; Mechanical 13 "*" at 5482.54,2892.5 h50 r270